# EAGLE board control_board (EAGLE 9.5.0)
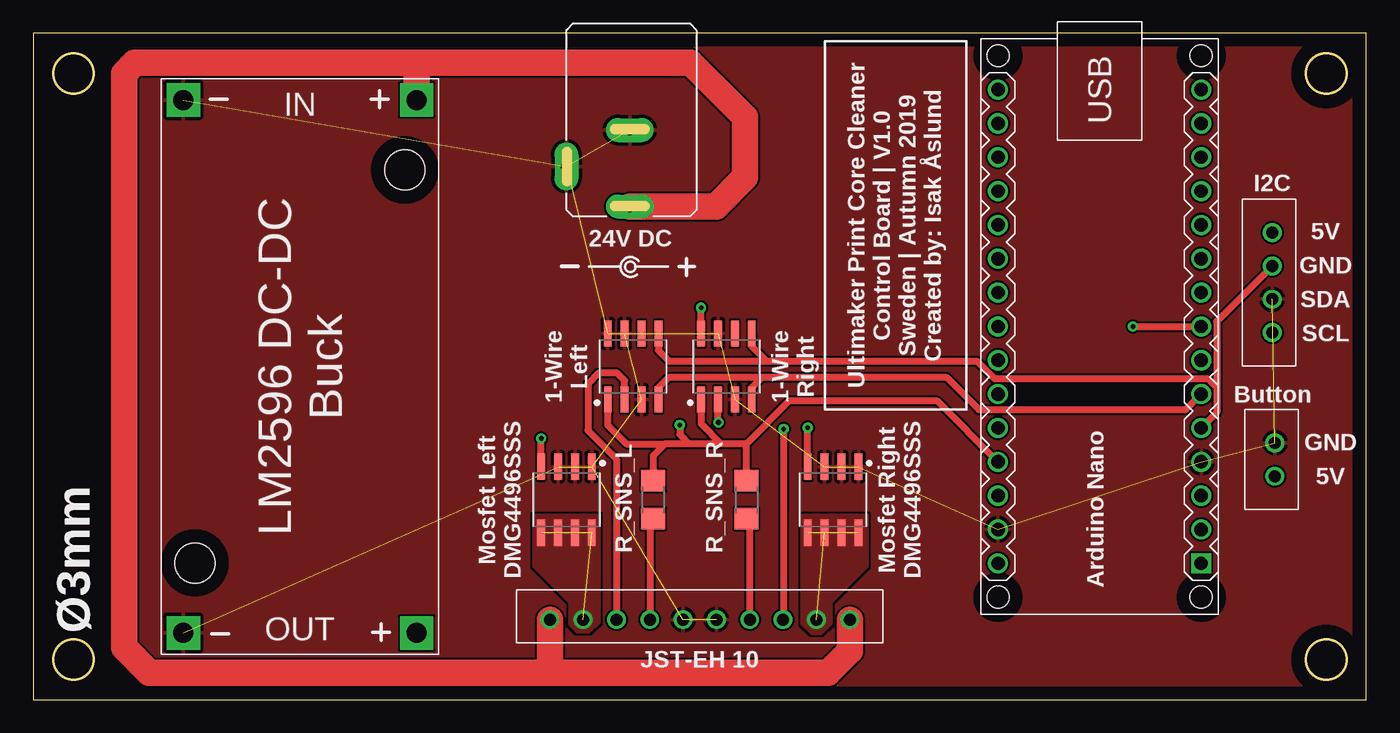
[diagram p0: board, top side]
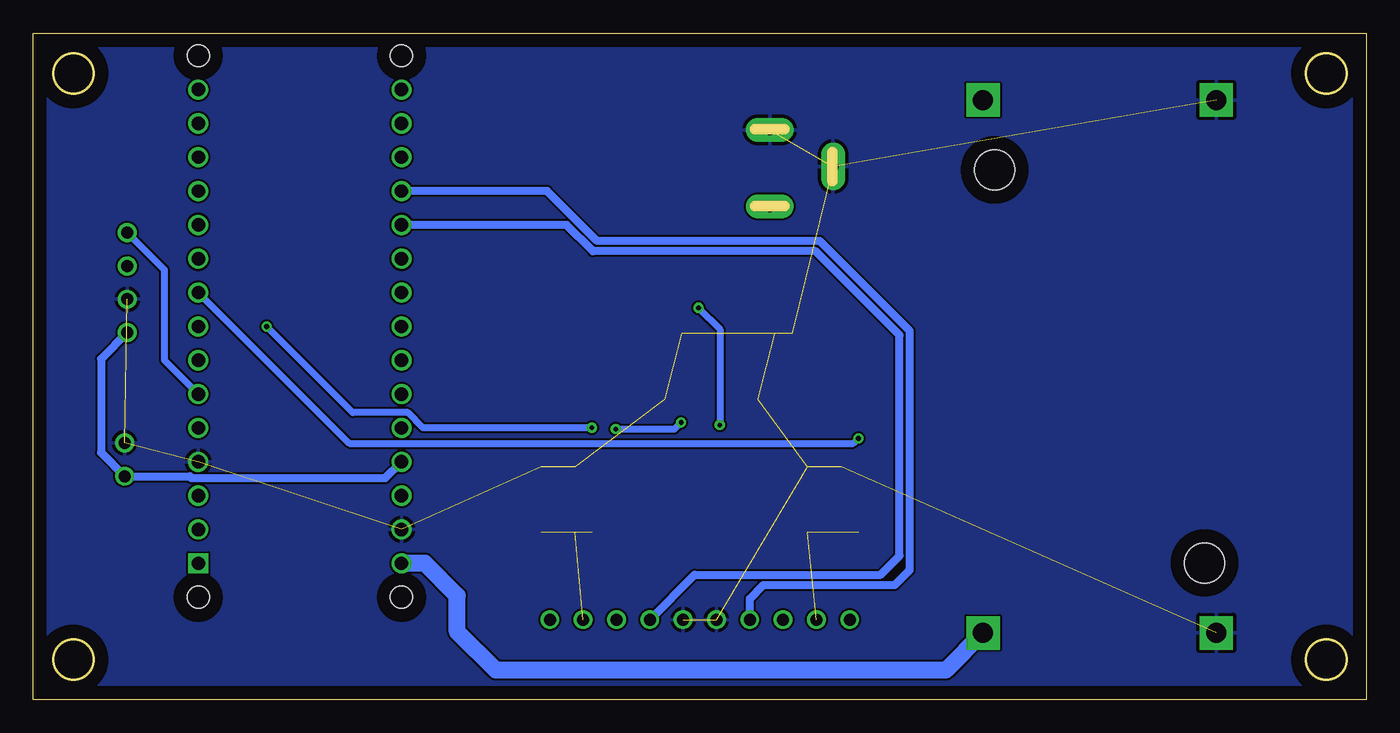
[diagram p1: board, bottom side, seen from below]

Size 100 x 50 mm. Coordinates in mm from the lower left corner, seen from the top.
Outline: 0,0 100,0 100,50 0,50 0,0
Outline: circle at 3,3 radius 1.5
Outline: circle at 3,47 radius 1.5
Outline: circle at 97,47 radius 1.5
Outline: circle at 97,3 radius 1.5
Copper layers (1*16): Top 0.035mm / dielectric 1.5mm / Bottom 0.035mm
Design rules "default": minimum track width 6mil, minimum drill 0.35mm, track to track 6mil, track to pad 6mil, pad to pad 6mil, via to via 6mil, smd to smd 6mil, copper to edge 40mil, drill to drill 6mil, minimum pad ring 10mil, minimum via ring 8mil, stop-mask expansion 4mil, vias tented up to drill 0mil, thermal gap 10mil

## Footprints (pad centres in the part's own frame; a part is rotated, then mirrored left to right if it is on the bottom)
B2B-EH = drill 0.9: 1 -1.25,0; 2 1.25,0
B10B-EH = drill 0.9: 1 -11.25,0; 2 -8.75,0; 3 -6.25,0; 4 -3.75,0; 5 -1.25,0; 6 1.25,0; 7 3.75,0; 8 6.25,0; 9 8.75,0; 10 11.25,0
WE_694106301002 = drill 0.8 pad 1.8 long: 1 3,4.75; 2 -2.75,4.75; 3 0,0
SOIC127P600X175-8N = smd 1.968 x 0.589: 1 -2.473,1.905; 2 -2.473,0.635; 3 -2.473,-0.635; 4 -2.473,-1.905; 5 2.473,-1.905; 6 2.473,-0.635; 7 2.473,0.635; 8 2.473,1.905
B4B-EH = drill 0.9: 1 -3.75,0; 2 -1.25,0; 3 1.25,0; 4 3.75,0
ARDUINO-NANO-3.0 = drill 1 square: J1.1 17.78,7.62 | drill 1: J1.2 15.24,7.62; J1.3 12.7,7.62; J1.4 10.16,7.62; J1.5 7.62,7.62; J1.6 5.08,7.62; J1.7 2.54,7.62; J1.8 0,7.62; J1.9 -2.54,7.62; J1.10 -5.08,7.62; J1.11 -7.62,7.62; J1.12 -10.16,7.62; J1.13 -12.7,7.62; J1.14 -15.24,7.62; J1.15 -17.78,7.62; J2.1 17.78,-7.62; J2.2 15.24,-7.62; J2.3 12.7,-7.62; J2.4 10.16,-7.62; J2.5 7.62,-7.62; J2.6 5.08,-7.62; J2.7 2.54,-7.62; J2.8 0,-7.62; J2.9 -2.54,-7.62; J2.10 -5.08,-7.62; J2.11 -7.62,-7.62; J2.12 -10.16,-7.62; J2.13 -12.7,-7.62; J2.14 -15.24,-7.62; J2.15 -17.78,-7.62 | hole 1.651: -20.32,7.62; -20.32,-7.62; 20.32,-7.62; 20.32,7.62
R1206 = smd 1.6 x 1.803: 1 -1.422,0; 2 1.422,0
DC-DC-STEP-DOWN-LM2596 = drill 1.5 pad 2.5 square: IN+ -20,8.75; IN- -20,-8.75; OUT+ 20,8.75; OUT- 20,-8.75 | hole 3: -14.75,7.875; 14.75,-7.875

## Placement (x,y rotation side)
BUTTON  EH_B2B-EH  [B2B-EH]  93.15,18.01 90 top
CON1  EH_B10B-EH  [B10B-EH]  50,6 0 top
DC_JACK_24V  WE_694106301002  [WE_694106301002]  40,40 270 top
DS2482-100_L  DS2482-100  [SOIC127P600X175-8N]  45,25 90 top
DS2482-100_R  DS2482-100  [SOIC127P600X175-8N]  52,25 90 top
I2C  EH_B4B-EH  [B4B-EH]  92.95,31.29 90 top
M1  ARDUINO-NANO-3.0  [ARDUINO-NANO-3.0]  80,28 270 top
R_SNS_L  120  [R1206]  46.5,15 90 top
R_SNS_R  120  [R1206]  53.5,15 90 top
U$1  DMG4496SSS  [SOIC127P600X175-8N]  40,15 270 top
U$2  DMG4496SSS  [SOIC127P600X175-8N]  60,15 270 top
U$5  DC-DC-STEP-DOWN-LM2596  [DC-DC-STEP-DOWN-LM2596]  20,25 270 top

## Library data of the parts
BUTTON CON1 I2C = CASE-JST
DC_JACK_24V = CASE_DC-Connector
DS2482-100_L DS2482-100_R M1 U$5 = Isaks Bibliotek
R_SNS_L R_SNS_R = CASE-RCL
U$1 U$2 = Isaks Bibliotek; VENDOR: RS

## Nets
3V3: M1.J2.14
5V: BUTTON.1 DS2482-100_L.1 DS2482-100_R.1 DS2482-100_R.8 I2C.1 M1.J2.4 R_SNS_L.2 R_SNS_R.2
12V: M1.J2.1 U$5.OUT+
24V: CON1.1 CON1.10 DC_JACK_24V.1 U$5.IN+
DATA_L: CON1.3 DS2482-100_L.2
DATA_R: CON1.8 DS2482-100_R.2
GND: BUTTON.2 CON1.5 CON1.6 DC_JACK_24V.2 DC_JACK_24V.3 DS2482-100_L.3 DS2482-100_L.7 DS2482-100_L.8 DS2482-100_R.3 DS2482-100_R.7 I2C.2 M1.J1.4 M1.J2.2 U$1.1 U$1.2 U$1.3 U$2.1 U$2.2 U$2.3 U$5.IN- U$5.OUT-
HEATER_2_L: CON1.2 U$1.5 U$1.6 U$1.7 U$1.8
HEATER_2_R: CON1.9 U$2.5 U$2.6 U$2.7 U$2.8
PT100_L: CON1.4 M1.J2.12 R_SNS_L.1
PT100_R: CON1.7 M1.J2.11 R_SNS_R.1
PWM_L: M1.J1.9 U$1.4
PWM_R: M1.J1.8 U$2.4
SCL: DS2482-100_L.4 DS2482-100_R.4 I2C.4 M1.J1.6
SDA: DS2482-100_L.5 DS2482-100_R.5 I2C.3 M1.J1.5

## Tracks (layer width: path | path; a pad name or v marks a point on that pad's centre or on a via)
5V  (via drill 0.35)
  Top 0.508: M1.J2.4 67.82,22.4 56.7,22.4 53.5,19.2 | R_SNS_R.2 53.5,19.2 | 53.5,19.2 51.6,19.2 | 51.6,19.2 49.2,19.2 | 49.2,19.2 47.4,19.2 | 47.4,19.2 46.5,18.3 R_SNS_L.2 | DS2482-100_L.1 43.09,20.61 44.5,19.2 47.4,19.2 | DS2482-100_R.1 50.09,20.7 51.6,19.2 | DS2482-100_R.8 v50.09,29.39 v50.1,29.4 | v48.5,20.6 48.5,19.9 49.2,19.2
  Bottom 0.508: v50.1,29.4 48.5,27.8 v48.5,20.6
  Bottom 0.61: M1.J2.4 73.59,16.63 88.12,16.63 88.25,16.76 BUTTON.1 94.92,18.53 94.92,25.57 I2C.1
12V
  Bottom 1.27: U$5.OUT+ 31.55,2.2 65.3,2.2 68.2,5.1 68.2,7.8 70.62,10.22 M1.J2.1
24V
  Top 2: DC_JACK_24V.1 51.2,37 53.4,39.2 53.4,43.7 49.3,47.8 29.15,47.8 | CON1.10 61.25,3.65 59.62,2.02 38.8,2.02 | 38.8,2.02 8.7,2.02 6.8,3.92 6.8,46.98 7.62,47.8 29.15,47.8 | U$5.IN+ 28.75,47.4 29.15,47.8 | CON1.1 38.75,2.07 38.8,2.02
DATA_L
  Top 0.508: DS2482-100_L.2 44.37,23.93 43.8,24.5 42.4,24.5 41.6,23.7 41.6,20.2 43.75,18.05 CON1.3
DATA_R  (via drill 0.35)
  Top 0.508: CON1.8 56.3,6.05 v56.3,20.3 | v51.4,20.8 51.37,20.84 DS2482-100_R.2
  Bottom 0.508: v56.3,20.3 51.9,20.3 v51.4,20.8
GND  (20 unrouted)
  pour Bottom (rank 6): -2.4,53.3 103.7,53.3 103.7,-4.9 -2.4,-4.9
  pour Top (rank 6): -4.7,55.4 107.1,55.4 107.1,-8.5 -4.7,-8.5
HEATER_2_L  (4 unrouted)
  pour Top (no thermals): 37.5,13.9 42.5,13.9 42.5,5.8 41.7,5 40.8,5 40.2,5.6 40.2,5.8 40.2,7.3 37.5,10
HEATER_2_R  (4 unrouted)
  pour Top (no thermals): 57.6,13.9 57.6,5.7 58.4,4.9 59.1,4.9 59.9,5.7 59.9,7.3 62.6,10 62.6,13.9
PT100_L
  Top 0.508: R_SNS_L.1 46.25,13.33 CON1.4
  Bottom 0.61: CON1.4 46.25,7.57 45.22,8.6 35.36,8.6 34.24,9.72 34.24,27.66 40.99,34.41 57.7,34.41 61.45,38.16 M1.J2.12
PT100_R
  Top 0.508: CON1.7 53.75,13.33 R_SNS_R.1
  Bottom 0.61: CON1.7 50.39,9.36 36.43,9.36 35,10.79 35,27.34 41.31,33.65 58.02,33.65 59.99,35.62 M1.J2.11
PWM_L  (via drill 0.35)
  Top 0.508: U$1.4 v38.09,19.59 v38.1,19.6
  Bottom 0.508: v38.1,19.6 38.48,19.22 76.3,19.22 M1.J1.9
PWM_R  (via drill 0.35)
  Top 0.508: U$2.4 v58.09,20.39 v58.1,20.4 | v82.5,28 M1.J1.8
  Bottom 0.508: v58.1,20.4 70.76,20.4 71.9,21.54 76.04,21.54 v82.5,28
SCL
  Top 0.508: DS2482-100_L.4 46.91,23.41 47.7,24.2 54.7,24.2 | DS2482-100_R.4 53.91,23.41 54.7,24.2 | 54.7,24.2 68.5,24.2 70.94,21.76 86.46,21.76 M1.J1.6
  Bottom 0.508: I2C.4 90.17,32.26 90.17,25.47 M1.J1.6
SDA
  Top 0.508: DS2482-100_L.5 46.91,26.2 47.7,25.4 55,25.4 | DS2482-100_R.5 53.91,26.5 55,25.4 | 88.78,23.4 88.1,24.08 72.12,24.08 70.8,25.4 55,25.4 | M1.J1.5 88.78,21.54 88.78,23.4 | I2C.3 88.78,28.37 88.78,23.4

## Text on the board
tPlace: I2C | Ultimaker Print Core Cleaner / Control Board | V1.0 / Sweden | Autumn 2019 / Created by: Isak Åslund | 24V DC | 5V / GND / SDA / SCL | github.com/caselabbet/ultimaker_print_core_cleaner | 1-Wire / Left | 1-Wire / Right | Button | GND / 5V | Mosfet Left / DMG4496SSS | R_SNS_L | R_SNS_R | Mosfet Right / DMG4496SSS | Arduino Nano | Ø3mm | JST-EH 10